# Altium PCB LM_001B.PcbDoc
Units mm, origin at the board's own origin, x right, y up, seen from the top; angles counter-clockwise.
Board outline 40.64 x 40.64 mm, 4 copper layers (Top Layer, +5V, Signal Layer 1, Bottom Layer), stack 0.778 mm thick; 36 components, 36 nets, 123 pads, 1 vias.
Unrouted connection lines stored in the file: 39.
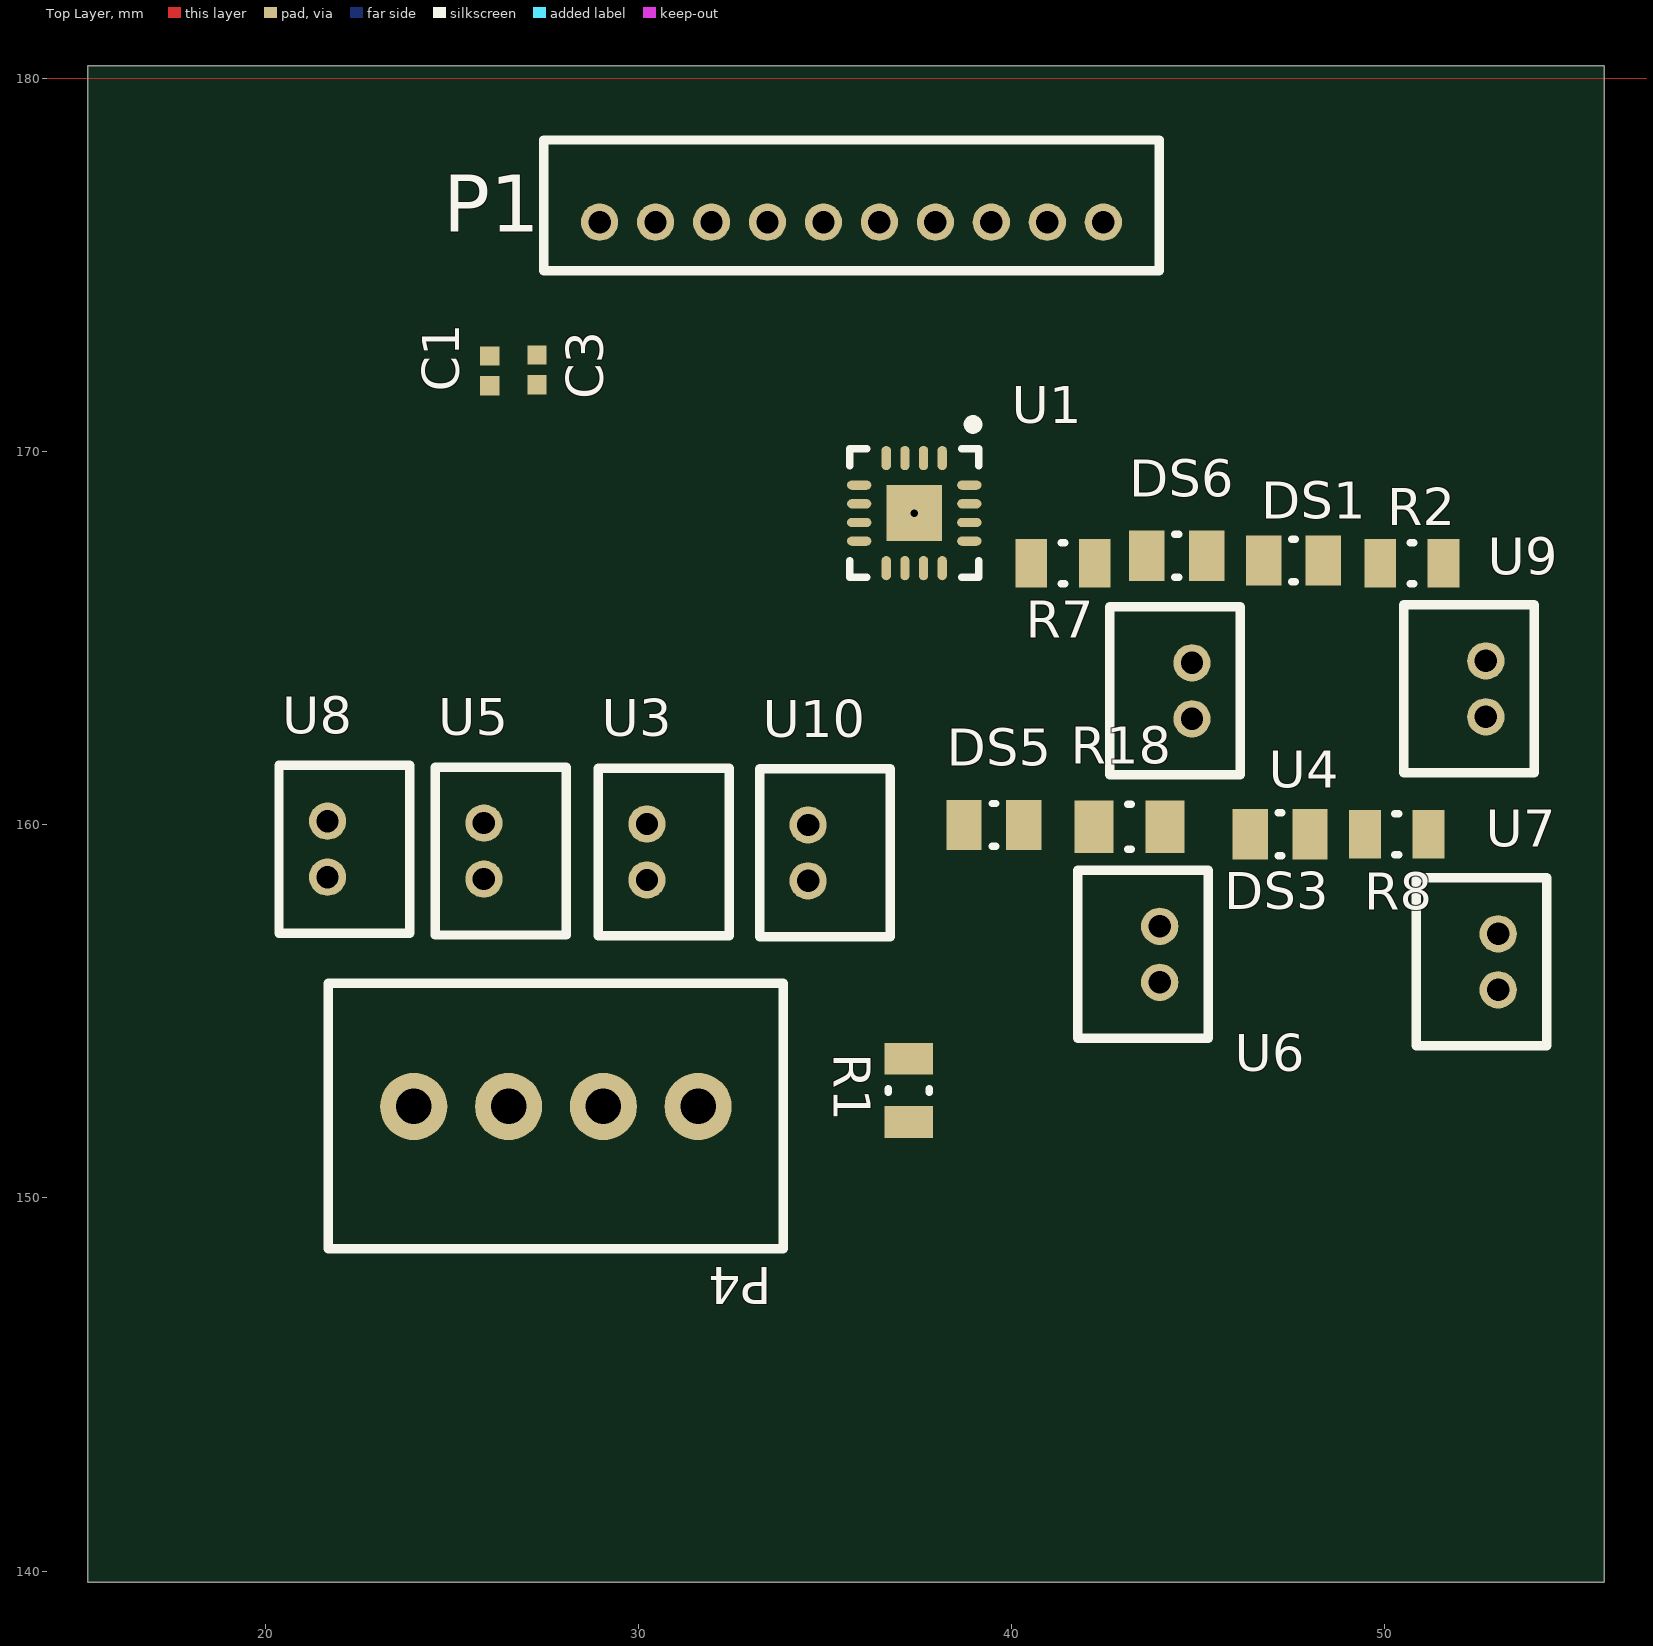
[diagram p0: Top Layer view]
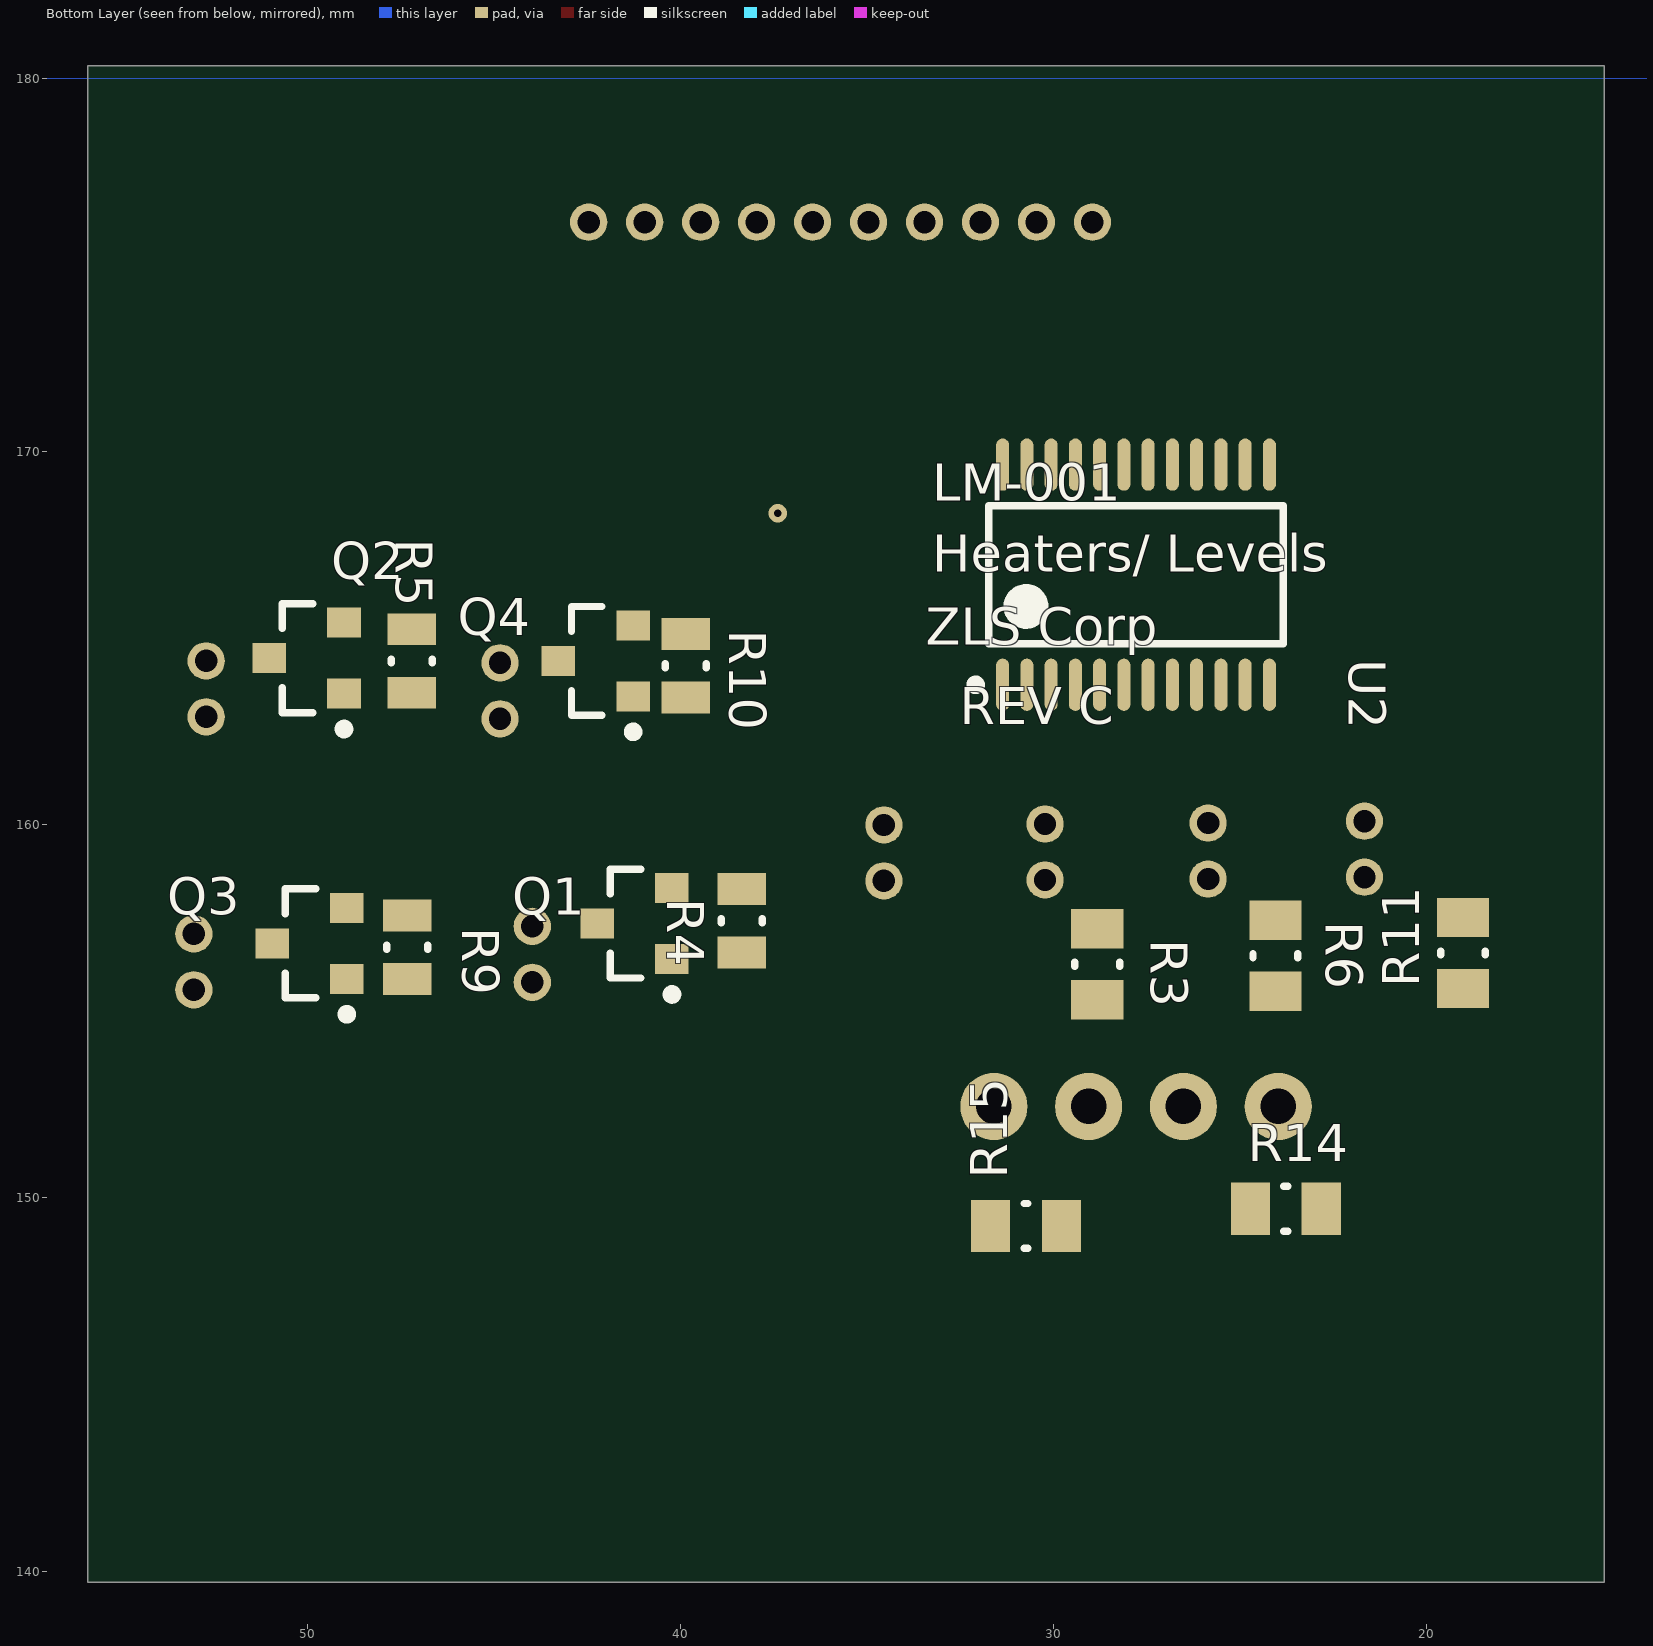
[diagram p1: Bottom Layer view, seen from below]
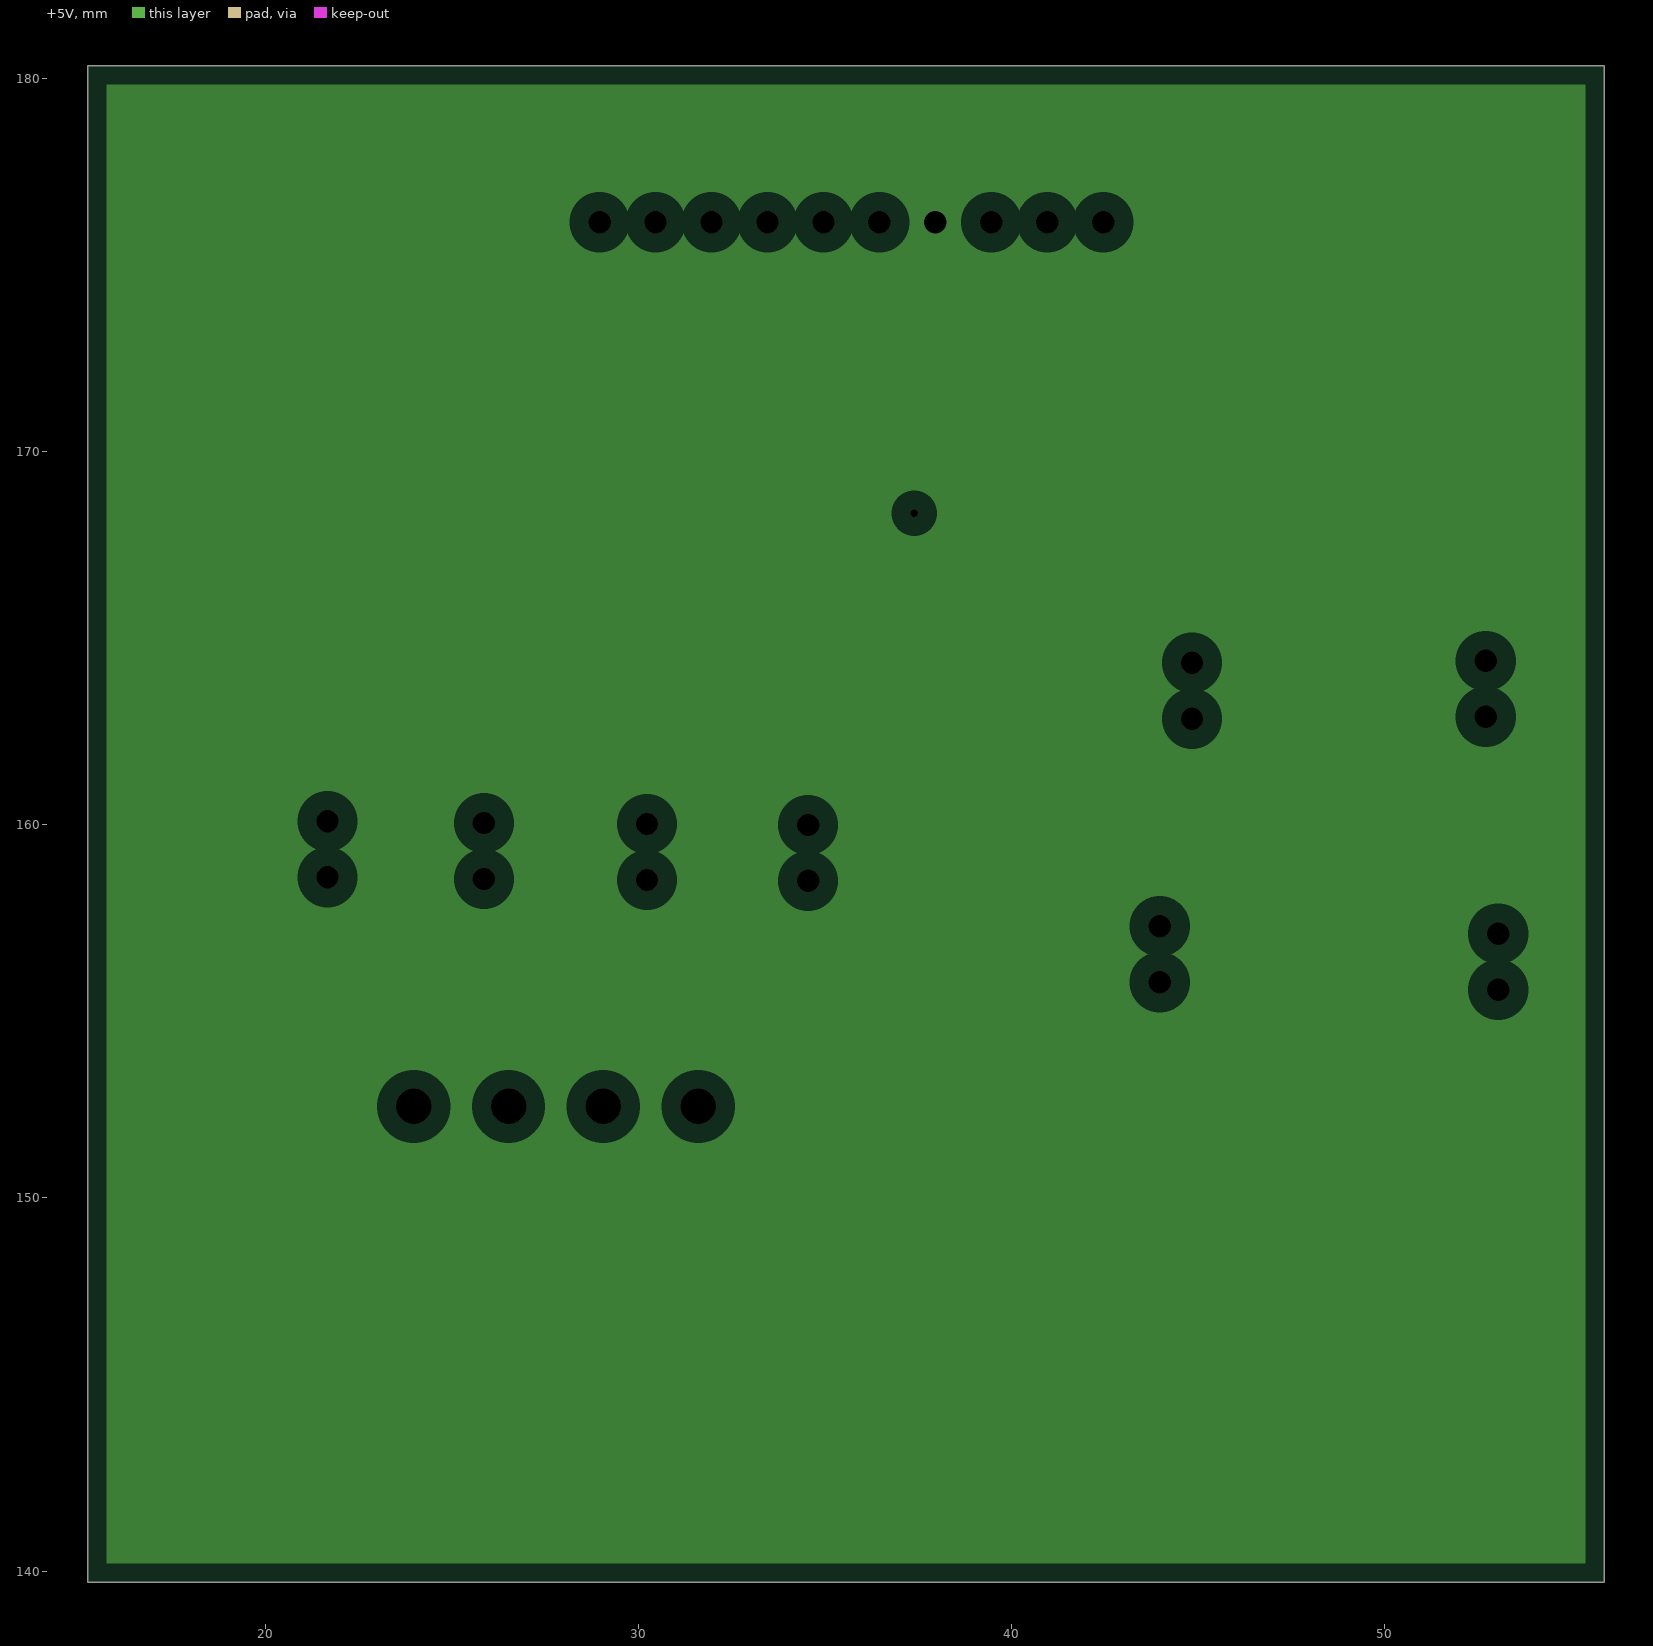
[diagram p2: +5V, clearances drawn from the general rule]
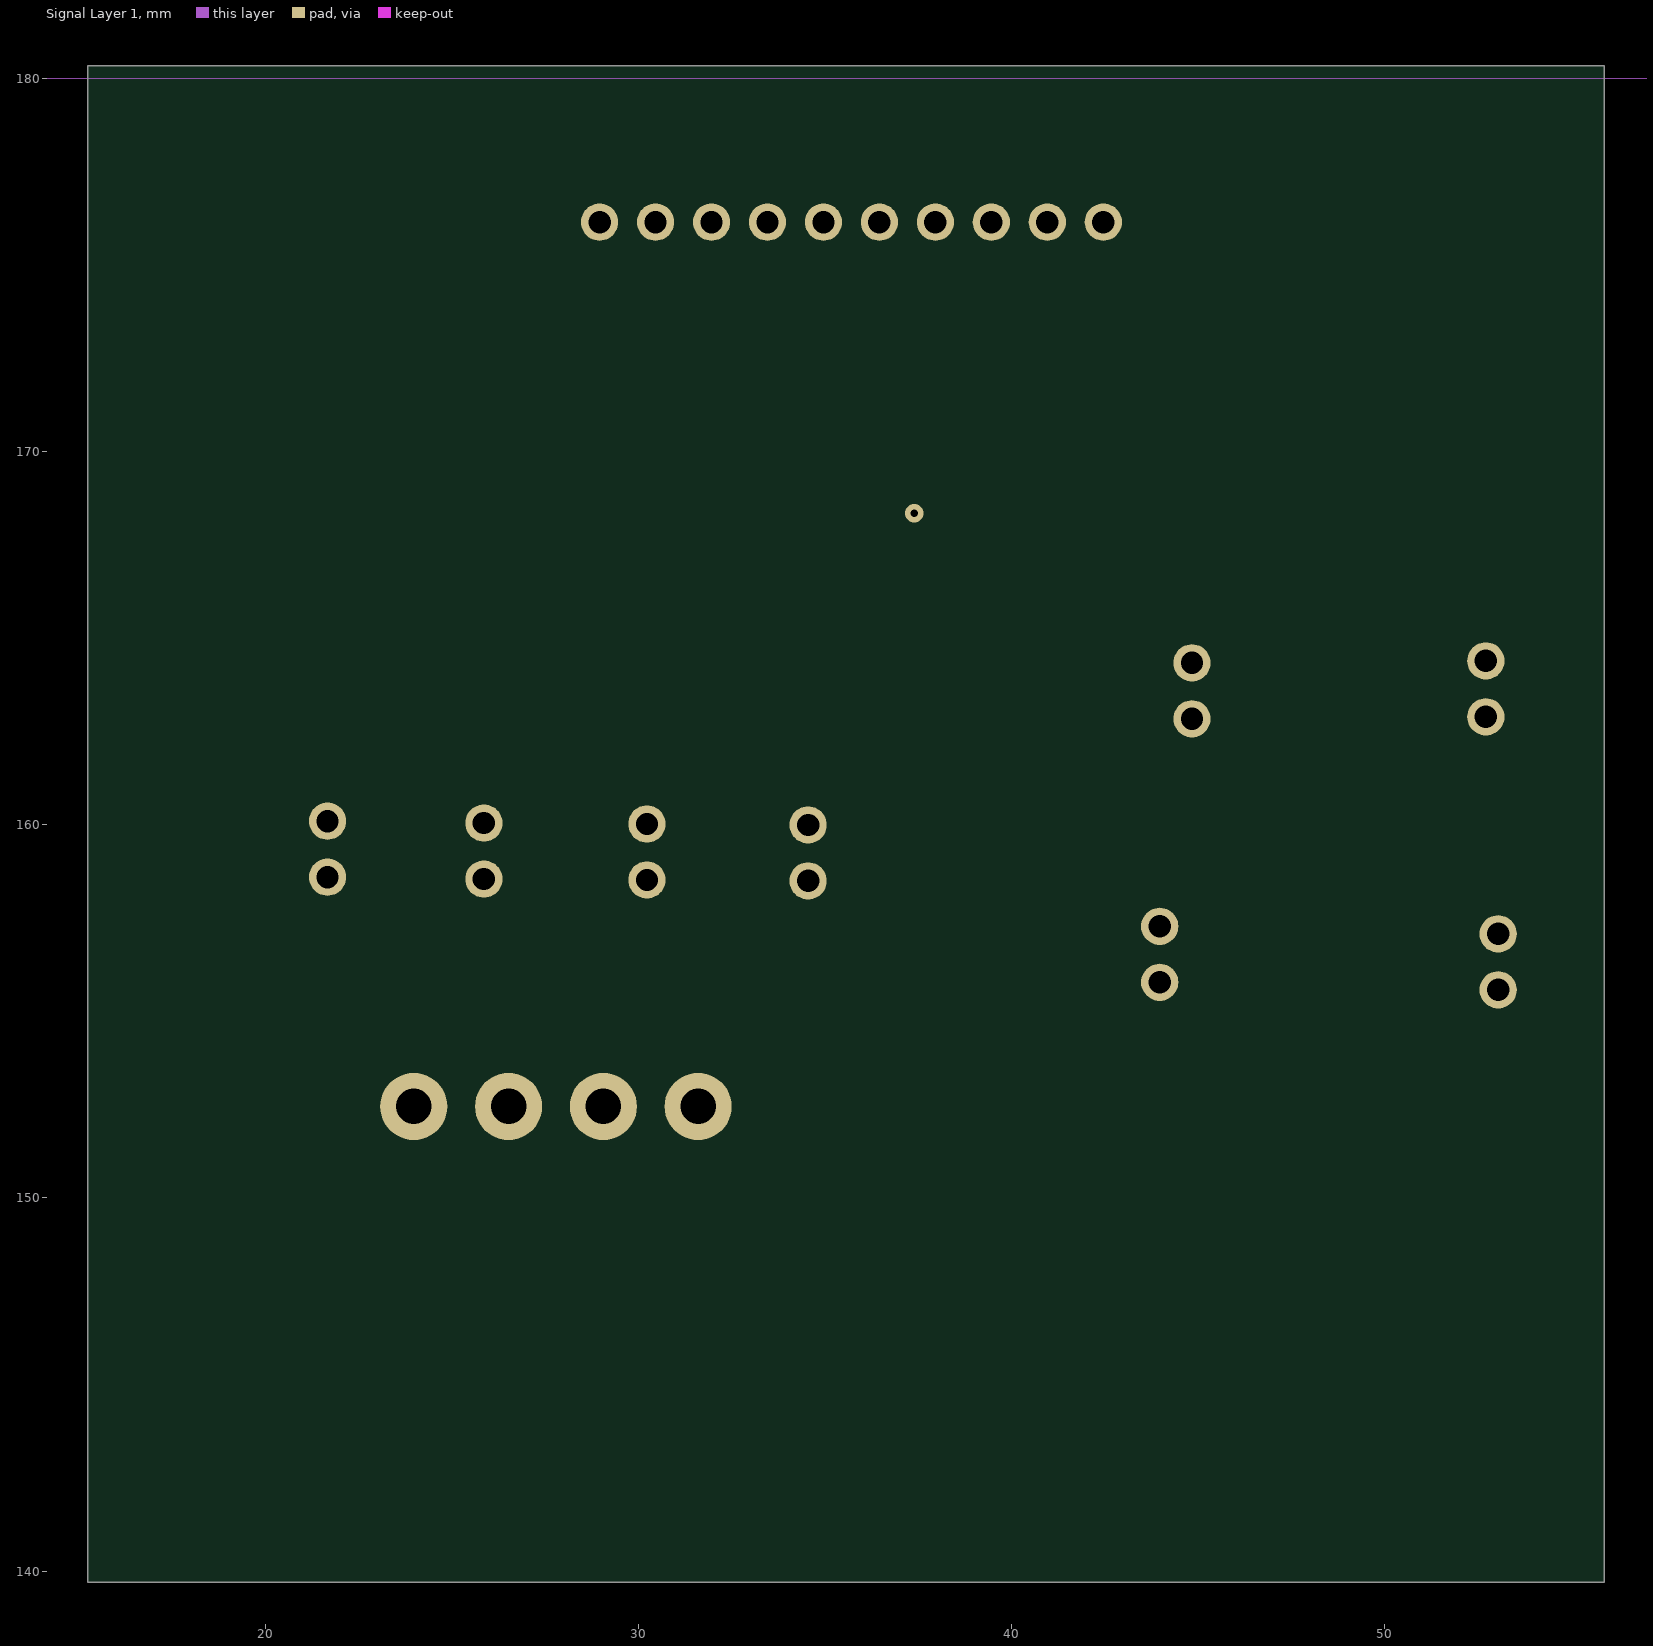
[diagram p3: Signal Layer 1]

## Layer stack, top to bottom
Top Solder: solder mask 0.0102, Solder Resist, Dk 3.5
Top Layer: signal copper 0.0356
Dielectric 1: core 0.254, FR-4, Dk 4.2
+5V: plane copper 0.036, net +5
Dielectric 4: prepreg 0.127, Dk 4.2
Signal Layer 1: signal copper 0.036
Dielectric 3: core 0.254, Dk 4.2
Bottom Layer: signal copper 0.0356
Bottom Solder: solder mask 0.0102, Solder Resist, Dk 3.5

## Board outline
15.24,180.34 55.88,180.34 55.88,139.7 15.24,139.7

## Design rules (kind name [scope] priority, off if disabled: settings)
Clearance [All] p1: gap=0.15 ignorepadtopadclearanceinfootprint=FALSE except(0.2: SMDPad-Fill SMDPad-Poly SMDPad-Region)
ComponentClearance [All] p1: gap=0 collisioncheckmode=3 verticalgap=0.254 showdistances=TRUE
MinimumSolderMaskSliver [All] p1: minsoldermaskwidth=0.045
PlaneClearance [All] p1: clearance=0.508
PlaneConnect [All] p1: planeconnectstyle=Relief reliefexpansion=0.508 reliefentries=4 reliefconductorwidth=0.254 reliefairgap=0.254
PolygonConnect [All] p1: connectstyle=Relief reliefconductorwidth=0.254 reliefentries=4 polygonreliefangle="90 Angle" airgapwidth=0.254
RoutingVias [All] p1: holewidth=0.711 width=1.27 viastyle="Through Hole" minholewidth=0.711 minwidth=1.27 maxholewidth=0.711 maxwidth=1.27
SilkToSilkClearance [All] p1: silktosilkclearance=0.127
SilkToSolderMaskClearance [IsPad] p1: minsilkscreentomaskgap=0.127 clearancetoexposedcopper=TRUE
SolderMaskExpansion [All] p1: expansion=0.2
Width [All] p1: maxlimit=0.762 minlimit=0.254 preferedwidth=0.254
24 further rules are at their usual default settings.

## Components (designator, comment, footprint, x,y, rotation, side; value= is the part's Value field where it differs from the comment)
C1 "0.1uF" CAPC0402(1005)60_L 26.01,172.161 r90 top
C3 "0.1uF" CAPC0402(1005)60_L 27.28,172.187 r270 top
DS1 "Visible Name Value Type    False Description Lite-On LTST-S220KRKT Red LED, 631 nm 2012 (0805) Side View, Rectangle Lens SMD package STRING" 0805C_L 47.549,167.081 r0 top
DS3 "Visible Name Value Type    False Description Lite-On LTST-S220KRKT Red LED, 631 nm 2012 (0805) Side View, Rectangle Lens SMD package STRING" 0805C_L 47.193,159.741 r0 top
DS5 "Visible Name Value Type    False Description Lite-On LTST-S220KRKT Red LED, 631 nm 2012 (0805) Side View, Rectangle Lens SMD package STRING" 0805C_L 39.522,159.995 r180 top
DS6 "Visible Name Value Type    False Description Lite-On LTST-S220KRKT Red LED, 631 nm 2012 (0805) Side View, Rectangle Lens SMD package STRING" 0805C_L 44.425,167.208 r180 top
P1 "B12B-ZR(LF)(SN)" B12B-ZR(LF)(SN) 28.956,176.149 r0 top
P4 "Header 4" IPL1-104-01-L-S-K 27.788,152.451 r0 top
Q1 "BSS138LT3G" ONSC-SOT-23-3-318-08_V 41.224,157.353 r0 bottom
Q2 "BSS138LT3G" ONSC-SOT-23-3-318-08_V 50.013,164.465 r0 bottom
Q3 "BSS138LT3G" ONSC-SOT-23-3-318-08_V 49.936,156.82 r0 bottom
Q4 "BSS138LT3G" ONSC-SOT-23-3-318-08_V 42.266,164.389 r0 bottom
R1 "" RESC0805(2012)_L 37.236,152.883 r90 top
R2 "" RESC0805(2012)_L 50.724,167.005 r0 top
R3 "6K98 1% 0805(2012)" RESC0805(2012)_N 28.829,156.261 r270 bottom
R4 "" RESC0805(2012)_L 38.354,157.429 r270 bottom
R5 "" RESC0805(2012)_L 47.193,164.389 r270 bottom
R6 "6K98 1% 0805(2012)" RESC0805(2012)_N 24.054,156.489 r270 bottom
R7 "" RESC0805(2012)_L 41.377,167.005 r180 top
R8 "" RESC0805(2012)_L 50.317,159.741 r180 top
R9 "" RESC0805(2012)_L 47.32,156.718 r270 bottom
R10 "" RESC0805(2012)_L 39.853,164.262 r270 bottom
R11 "6K98 1% 0805(2012)" RESC0805(2012)_N 19.025,156.566 r90 bottom
R14 "6K98 1% 0805(2012)" RESC0805(2012)_N 23.774,149.708 r180 bottom
R15 "6K98 1% 0805(2012)" RESC0805(2012)_N 30.734,149.25 r180 bottom
R18 "6K98 1% 0805(2012)" RESC0805(2012)_N 43.155,159.944 r0 top
U1 "MCP23S09-E/MG" QFN-MG16_L 37.389,168.351 r270 top
U2 "MAX1300" MAX1300 27.788,166.7 r90 bottom
U3 "B2B-ZR(LF)(SN)" B2B-ZR(LF)(SN) 30.226,160.02 r270 top
U4 "B2B-ZR(LF)(SN)" B2B-ZR(LF)(SN) 44.831,162.839 r90 top
U5 "B2B-ZR(LF)(SN)" B2B-ZR(LF)(SN) 25.857,160.045 r270 top
U6 "B2B-ZR(LF)(SN)" B2B-ZR(LF)(SN) 43.967,155.778 r90 top
U7 "B2B-ZR(LF)(SN)" B2B-ZR(LF)(SN) 53.035,155.575 r90 top
U8 "B2B-ZR(LF)(SN)" B2B-ZR(LF)(SN) 21.666,160.096 r270 top
U9 "B2B-ZR(LF)(SN)" B2B-ZR(LF)(SN) 52.705,162.89 r90 top
U10 "B2B-ZR(LF)(SN)" B2B-ZR(LF)(SN) 34.544,159.995 r270 top

## Footprints (in the part's own frame and the unit in brackets; to place one, negate y for a bottom-side part, rotate by r counter-clockwise, add the part's x,y. Pads: shape width x height; smd on the part's side, far side on the other; paste and mask are expansions set on the pad)
0805C_L [mm]
  rect 0.95x1.35 smd: 1(-0.8,0) 2(0.8,0)
  silkscreen extent -0.05,-0.58 0.05,0.58, body extent -1.1,-0.72 1.1,0.72, height 0.75
B2B-ZR(LF)(SN) [mm]
  round 1 hole 0.6: 1(0,0) 2(1.5,0)
  silkscreen extent -1.5,-1.3 3,2.2
B12B-ZR(LF)(SN) [mm]
  round 1 hole 0.6: 1(0,0) 2(1.5,0) 3(3,0) 4(4.5,0) 5(6,0) 6(7.5,0) 7(9,0) 8(10.5,0) 9(12,0) 10(13.5,0)
  silkscreen extent -1.5,-1.3 15,2.2
CAPC0402(1005)60_L [mm] "Chip Capacitor, Body 1.0x0.5mm, Height 0.6mm, IPC High Density"
  rect 0.52x0.52 smd: 1(-0.4,0) 2(0.4,0)
  body extent -0.55,-0.3 0.55,0.3, height 0.6
IPL1-104-01-L-S-K [mm]
  round 1.8 hole 0.95: 1(-3.81,0) 2(-1.27,0) 3(1.27,0) 4(3.81,0)
  silkscreen extent -6.1,-3.81 6.1,3.3, body extent -5.84,-3.3 5.84,3.3, height 8.13
MAX1300 [mm] "TSOP, 24-Leads, Body 7.80x4.40mm, Pitch 0.65mm, IPC Medium Density"
  oval 1.4x0.35 smd: 1(-2.95,3.575) 2(-2.95,2.925) 3(-2.95,2.275) 4(-2.95,1.625) 5(-2.95,0.975) 6(-2.95,0.325) 7(-2.95,-0.325) 8(-2.95,-0.975) 9(-2.95,-1.625) 10(-2.95,-2.275) 11(-2.95,-2.925) 12(-2.95,-3.575) 13(2.95,-3.575) 14(2.95,-2.925) 15(2.95,-2.275) 16(2.95,-1.625) 17(2.95,-0.975) 18(2.95,-0.325) 19(2.95,0.325) 20(2.95,0.975) 21(2.95,1.625) 22(2.95,2.275) 23(2.95,2.925) 24(2.95,3.575)
  silkscreen extent -3.07,-3.95 1.85,4.43, body extent -3.2,-3.95 3.2,3.95, height 1.1
ONSC-SOT-23-3-318-08_V [mm] "SOT23, 3-Leads, Body 2.92x1.3mm, Pitch 0.95mm"
  rect 0.9x0.8 smd: 1(-1,0.95) 2(-1,-0.95) 3(1,0)
  silkscreen extent -1.12,-1.46 0.65,2.02, body extent -0.65,-1.46 0.65,1.46, height 1.11
QFN-MG16_L [mm] "QFN, 16-Leads, Body 3x3mm, Pitch 0.5mm, Thermal Pad 1.5x1.5mm, IPC High Density"
  oval 0.65x0.25 smd: 1(-1.475,0.75) 2(-1.475,0.25) 3(-1.475,-0.25) 4(-1.475,-0.75) 9(1.475,-0.75) 10(1.475,-0.25) 11(1.475,0.25) 12(1.475,0.75)
  oval 0.25x0.65 smd: 5(-0.75,-1.475) 6(-0.25,-1.475) 7(0.25,-1.475) 8(0.75,-1.475) 13(0.75,1.475) 14(0.25,1.475) 15(-0.25,1.475) 16(-0.75,1.475)
  rect 1.5x1.5 smd: 17(0,0)
  silkscreen extent -2.5,-1.73 1.73,1.73, body extent -1.57,-1.57 1.58,1.58, height 0.9
RESC0805(2012)_L [mm] "Chip Resistor, Body 2.0x1.3mm, IPC High Density"
  rect 0.85x1.3 smd: 1(-0.85,0) 2(0.85,0)
  silkscreen extent -0.05,-0.55 0.05,0.55, body extent -1.1,-0.67 1.1,0.68, height 0.7
RESC0805(2012)_N [mm] "Chip Resistor, Body 2.0x1.3mm, IPC Medium Density"
  rect 1.05x1.4 smd: 1(-0.95,0) 2(0.95,0)
  silkscreen extent -0.05,-0.6 0.05,0.6, body extent -1.1,-0.67 1.1,0.68, height 0.7

## Part data
C1 C3: library part CMP-1034-00252-1, "CAP CER 0.1UF 10V X7R 0402", Manufacturer="Murata Electronics North America", Manufacturer Part Number=GRM155R71A104KA01D, Operating Temperature="-55°C ~ 125°C", Package / Case="0402 (1005 Metric)", Ratings=-, Supplier Part Number 1=490-6321-1-ND, Temperature Coefficient=X7R, Tolerance=±10%, Voltage - Rated=10V, Applications="General Purpose", Category=Capacitors, ComponentLink1Description=http://www.murata.com/~/media/webrenewal/support/library/catalog/products/capacitor/mlcc/c02e.ashx?la=en-us, ComponentLink1URL=http://www.murata.com/~/media/webrenewal/support/library/catalog/products/capacitor/mlcc/c02e.ashx?la=en-us, Features=-, Height - Seated (Max)=-, Lead Spacing=-, Mounting Type="Surface Mount, MLCC", Packaging="Cut Tape (CT)", Part Status=Active, Pricing 1="1=0.1, 10=0.014, 100=0.0063, 500=0.00446, 1000=0.00351, 2500=0.00319, 5000=0.00293 (USD)", RoHS="RoHS Compliant", Size / Dimension="0.039\" L x 0.020\" W (1.00mm x 0.50mm)", Stock 1=2920395, Supplier 1=Digi-Key, Thickness (Max)="0.022\" (0.55mm)"
DS1 DS3 DS5 DS6: library part "LED A/K", Case/Package=0805, Case Code (Metric)=2012, Colour=Red, Forward Current=20mA, Forward Voltage=2V, Lens Colour=Colorless, Manufacturer="Vishay / Lite-On", Manufacturer Part Number=LTST-S220KRKT, Max Operating Temperature=85°C, Min Operating Temperature=-55°C, Package Quantity=4000, Power Dissipation=75mW, Supplier Part Number 1=160-1469-1-ND, Case Code (Imperial)=0805, ComponentLink1Description=https://datasheet.ciiva.com/2110/s-110-ltst-s220krkt-2110132.pdf, ComponentLink1URL=https://datasheet.ciiva.com/2110/s-110-ltst-s220krkt-2110132.pdf, ComponentLink2Description=https://datasheet.ciiva.com/2110/s-110-ltst-s220krkt-2110133.pdf, ComponentLink2URL=https://datasheet.ciiva.com/2110/s-110-ltst-s220krkt-2110133.pdf, ComponentLink3Description=https://datasheet.ciiva.com/2110/s-110-ltst-s220krkt-2110134.pdf, ComponentLink3URL=https://datasheet.ciiva.com/2110/s-110-ltst-s220krkt-2110134.pdf, ComponentLink4Description=https://datasheet.ciiva.com/12403/lite-on-ltst-s220krkt-187389-12403798.pdf, ComponentLink4URL=https://datasheet.ciiva.com/12403/lite-on-ltst-s220krkt-187389-12403798.pdf, ComponentLink5Description=https://datasheet.ciiva.com/16345/lite-onltst-s220krkt-16345511.pdf, ComponentLink5URL=https://datasheet.ciiva.com/16345/lite-onltst-s220krkt-16345511.pdf, ComponentLink6Description=https://datasheet.ciiva.com/15118/getdatasheetpartid-225752-15118120.pdf, ComponentLink6URL=https://datasheet.ciiva.com/15118/getdatasheetpartid-225752-15118120.pdf, ComponentLink7Description=https://datasheet.ciiva.com/14633/0900766b80dc0b76-14633737.pdf, ComponentLink7URL=https://datasheet.ciiva.com/14633/0900766b80dc0b76-14633737.pdf, ComponentLink8Description=https://datasheet.ciiva.com/11775/0900766b80dc0b76-11775439.pdf, ComponentLink8URL=https://datasheet.ciiva.com/11775/0900766b80dc0b76-11775439.pdf, Depth=0.6mm, Dominant Wavelength=631nm, Height=0.6mm, Illumination Colour=Red, Lead Free="Lead Free", Length=2.1mm, Lens Style=Diffused,Colorless, Lens Transparency=Clear, Luminous Intensity=54mcd, Mount="Surface Mount", Number of Elements=1, Number of LEDs=1, Number of Pins=2, Packaging="Tape and Reel", Power Rating=75mW, Pricing 1="1=0.31, 10=0.225, 25=0.1656, 100=0.1183, 250=0.0804, 500=0.071, 1000=0.0556 (USD)", Radiation Hardening=No, Stock 1=108191, Supplier 1=Digi-Key, Test Current=20mA, Viewing Angle=130°, Wavelength=639nm, Width=1mm
P4: "Header, 4-Pin", LatestRevisionDate=17-Jul-2002, LatestRevisionNote="Re-released for DXP Platform.", Publisher="Altium Limited"
Q1 Q2 Q3 Q4: library part CMP-1058-00765-1, "Power MOSFET, 200 mA, 50 V, N-Channel, 3-Pin SOT-23, Pb-Free, Tape and Reel", Manufacturer="On Semiconductor", Package Type=SOT-23-3, Channel Polarity="N Channel", Ciss Typ (pF)=40, ComponentLink1Description="Manufacturer URL", ComponentLink1URL=http://www.onsemi.com/, ComponentLink2Description=Datasheet, ComponentLink2URL=http://www.onsemi.com/pub_link/Collateral/BSS138LT1-D.PDF, ComponentLink3Description="Package Specification", ComponentLink3URL=http://www.onsemi.cn/pub_link/Collateral/318-08.PDF, Configuration=Single, Coss Typ (pF)=12, Crss Typ (pF)=3.5, DatasheetVersion="Rev. 8", ID Max (A)=0.2, Mounting Technology="Surface Mount", PackageDescription="3-Pin Small Outline Transistor, Body 2.92 x 1.3 mm, Pitch 0.95 mm", PackageReference=SOT-23-3-318-08, PackageVersion="Rev. AP, 11/2009", Packing="Tape and Reel", PartNumber=BSS138LT3G, PD Max (W)=0.225, RoHS=Pb-Free, V(BR)DSS Min (V)=50, VGS(th) Max (V)=1.5, VGS Max (V)=20
R1 R2 R7 R8: library part CMP-1013-00393-1, Manufacturer="Vishay Dale", Manufacturer Part Number=CRCW08054K99FKEA, Operating Temperature="-55°C ~ 155°C", Package / Case="0805 (2012 Metric)", Power (Watts)="0.125W, 1/8W", Resistance (Ohms)=4.99k, Supplier Device Package=0805, Supplier Part Number 1=541-4.99KCCT-ND, Temperature Coefficient=±100ppm/°C, Tolerance=±1%, Category=Resistors, ComponentLink1Description=http://www.vishay.com/docs/20035/dcrcwe3.pdf, ComponentLink1URL=http://www.vishay.com/docs/20035/dcrcwe3.pdf, Composition="Thick Film", Failure Rate=-, Features="Automotive AEC-Q200", Height - Seated (Max)="0.020\" (0.50mm)", Packaging="Cut Tape (CT)", Part Status=Active, Pricing 1="1=0.1, 10=0.044, 100=0.0178, 1000=0.00802, 2500=0.00696 (USD)", RoHS="RoHS Compliant", Size / Dimension="0.079\" L x 0.049\" W (2.00mm x 1.25mm)", Stock 1=93740, Supplier 1=Digi-Key
R3 R6 R11 R14 R15 R18: library part CMP-1013-00606-1, "6K98 0.125W 1% 0805 (2012 Metric)  SMD", Manufacturer="Vishay Dale", Manufacturer Part Number=CRCW08056K98FKEA, Operating Temperature="-55°C ~ 155°C", Package / Case="0805 (2012 Metric)", Power (Watts)="0.125W, 1/8W", Resistance (Ohms)=6.98k, Supplier Device Package=0805, Supplier Part Number 1=541-6.98KCCT-ND, Temperature Coefficient=±100ppm/°C, Tolerance=±1%, Category=Resistors, ComponentLink1Description=http://www.vishay.com/docs/20035/dcrcwe3.pdf, ComponentLink1URL=http://www.vishay.com/docs/20035/dcrcwe3.pdf, Composition="Thick Film", Failure Rate=-, Features="Automotive AEC-Q200", Height - Seated (Max)="0.020\" (0.50mm)", Packaging="Cut Tape (CT)", Part Status=Active, Pricing 1="1=0.1, 10=0.044, 100=0.0178, 1000=0.00802, 2500=0.00696 (USD)", RoHS="RoHS Compliant", Size / Dimension="0.079\" L x 0.049\" W (2.00mm x 1.25mm)", Stock 1=34245, Supplier 1=Digi-Key
R4 R5 R9 R10: library part CMP-1013-00393-1, Manufacturer="Vishay Dale", Manufacturer Part Number=CRCW080575R0FKEA, Operating Temperature="-55°C ~ 155°C", Package / Case="0805 (2012 Metric)", Power (Watts)="0.125W, 1/8W", Resistance (Ohms)=75, Supplier Device Package=0805, Supplier Part Number 1=541-75.0CCT-ND, Temperature Coefficient=±100ppm/°C, Tolerance=±1%, Category=Resistors, ComponentLink1Description=http://www.vishay.com/docs/20035/dcrcwe3.pdf, ComponentLink1URL=http://www.vishay.com/docs/20035/dcrcwe3.pdf, Composition="Thick Film", Failure Rate=-, Features="Automotive AEC-Q200", Height - Seated (Max)="0.020\" (0.50mm)", Packaging="Cut Tape (CT)", Part Status=Active, Pricing 1="1=0.1, 10=0.044, 100=0.0178, 1000=0.00802, 2500=0.00696 (USD)", RoHS="RoHS Compliant", Size / Dimension="0.079\" L x 0.049\" W (2.00mm x 1.25mm)", Stock 1=32546, Supplier 1=Digi-Key
U1: library part CMP-0186-00112-2, "8-Bit I/O Expander with Open-Drain Outputs, High-Speed SPI Interface, 16-Pin QFN, Extended Temperature", ComponentLink1Description="Manufacturer URL", ComponentLink1URL=http://www.microchip.com/, ComponentLink2Description=Datasheet, ComponentLink2URL=http://ww1.microchip.com/downloads/en/DeviceDoc/22121b.pdf, ComponentLink3Description="Package Specification", ComponentLink3URL=http://www.microchip.com/stellent/groups/techpub_sg/documents/packagingspec/en012702.pdf, DatasheetVersion="revB, May-2009", PackageDescription="16-Lead Plastic Quad Flat, No Lead Package (MG) - 3x3x0.9 mm Body [QFN]", PackageReference=QFN-MG16, PackageVersion="revBB, Aug-2009", RevisionNote="URLs added."

## Via types
v1: diameter 0.5, hole 0.2, Top Layer to Bottom Layer, 1 vias

## Nets (pads, with @x,y where several pads share a name; then routed paths per layer and width w, separated by ;. In a path a pad name is that pad's centre, name@x,y a point inside that pad or via, vN(x,y) a via of type N, cw(c..) or ccw(c..) an arc to the next point about the centre after c; other vN are vias at no path point)
+3.3: P1.8 U2.17
+5: P1.7 R3.2 R6.2 R11.1 R14.1 R15.2 R18.1 U2.1 U2.22
+12: DS1.1 DS3.1 DS5.1 DS6.1 P1.9 P1.10 U4.1 U6.1 U7.1 U9.1
"Arrestment Heater FET": R9.1 U1.10
"Arrestment Htr Out": Q3.3 R8.2 U7.2
"Arrestment Htr_LED": DS3.2 R8.1
"Arrestment Thermistor": R11.2 U2.3 U8.1
"Board1 Thermistor": R18.2 U2.8 U10.1
"Board2 Thermistor": U2.9
"Conning Tower Heater FET": R4.1 U1.9
"Conning Tower Htr Out": Q1.3 R1.1 U6.2
"Conning Tower Htr_LED": DS5.2 R1.2
"Conning Tower Thermistor": R3.1 U2.5 U3.1
"Gearbox Heater FET": R10.1 U1.11
"Gearbox Htr Out": Q4.3 R7.1 U4.2
"Gearbox Htr_LED": DS6.2 R7.2
"Gearbox Thermistor": R6.1 U2.4 U5.1
GND: C1.2 C3.2 P4.2 P4.4 Q1.2 Q2.2 Q3.2 Q4.2 U2.15 U2.16 U2.18 U2.21 U2.23 U2.24 U3.2 U5.2 U8.2 U10.2
I2C2_SCL: P1.5
I2C2_SDA: P1.6
"Lid Thermistor": U2.2
"Meter Heater FET": R5.1 U1.12
"Meter Thermistor 1": P4.3 R15.1 U2.7
"Meter Thermistor 2": P4.1 R14.2 U2.6
Meter_Htr_LED: DS1.2 R2.1
METER_HTR_OUT: Q2.3 R2.2 U9.2
NetC1_1: C1.1 U2.20
NetC3_1: C3.1 U2.19
NetQ1_1: Q1.1 R4.2
NetQ2_1: Q2.1 R5.2
NetQ3_1: Q3.1 R9.2
NetQ4_1: Q4.1 R10.2
SPI0_MISO: P1.3 U2.14
SPI0_MOSI: P1.4 U2.11
SPI0_SCLK: P1.2 U2.13
Thermistor_CS0: P1.1 U2.10
pads on no net: U1.1 U1.2 U1.3 U1.4 U1.5 U1.6 U1.7 U1.8 U1.13 U1.14 U1.15 U1.16 U1.17 U2.12
copper on no net:
  other v1: 37.389,168.351

## Polygon pours and split planes (outlines as drawn)
GND on Top Layer "NONET_L01_P001" (solid, shelved, pour order 1): -1.153,180 66.958,180 66.757,0 -1.153,0
GND on Bottom Layer "NONET_L04_P000" (solid, shelved, pour order 0): -1.153,0 66.955,0 66.955,180 -1.153,180
GND on Signal Layer 1 "NONET_L03_P003" (solid, shelved, pour order 3): -1.308,180 66.8,180 66.8,0 -1.308,0
+5 on +5V (split plane): 55.37,179.83 55.37,140.21 15.75,140.211 15.75,179.83

## Other copper
Bottom Layer:
  text "C" at 91.219,-2473.611 h2762.86
  text "7" at 92.703,-2473.611 h2762.86

## Silkscreen, mask and mechanical layers (free items; w line width, h text height)
Bottom Overlay:
  text "LM-001" at 33.249,168.681 h1
  text "Heaters/ Levels" at 33.249,166.776 h1
  text "ZLS Corp" at 33.426,164.821 h1
  text "REV C" at 32.512,162.687 h1

## Dimensions
15.24,180.34 to 55.88,180.34 on Mechanical 13
55.88,139.7 to 55.88,180.34 on Mechanical 13